# EAGLE board 555_Solar_Wind (EAGLE 6.4)
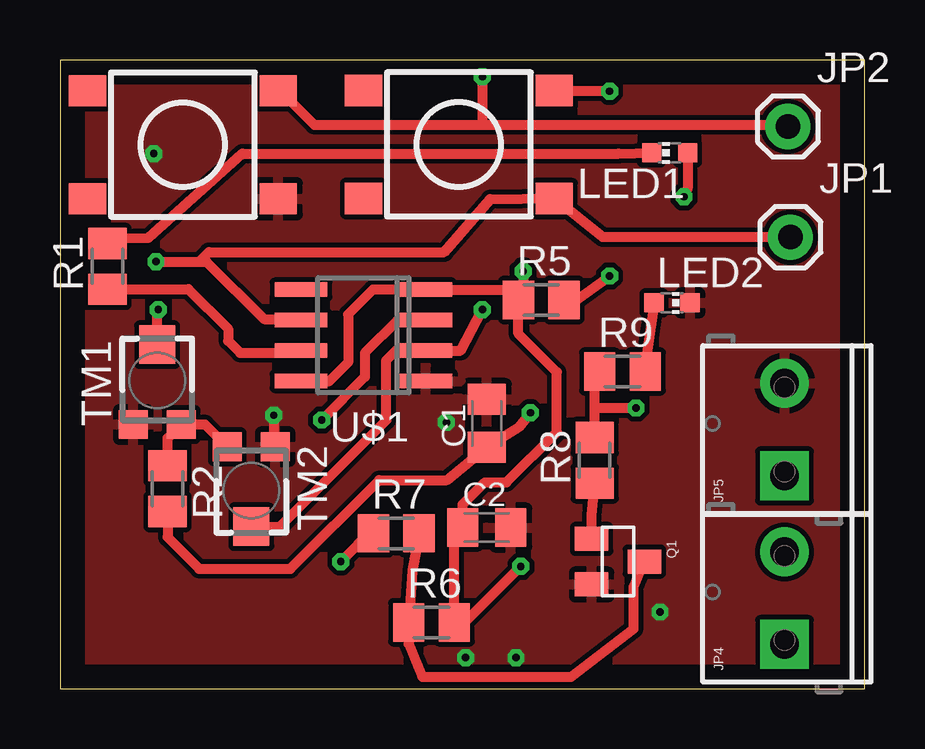
[diagram p0: board, top side]
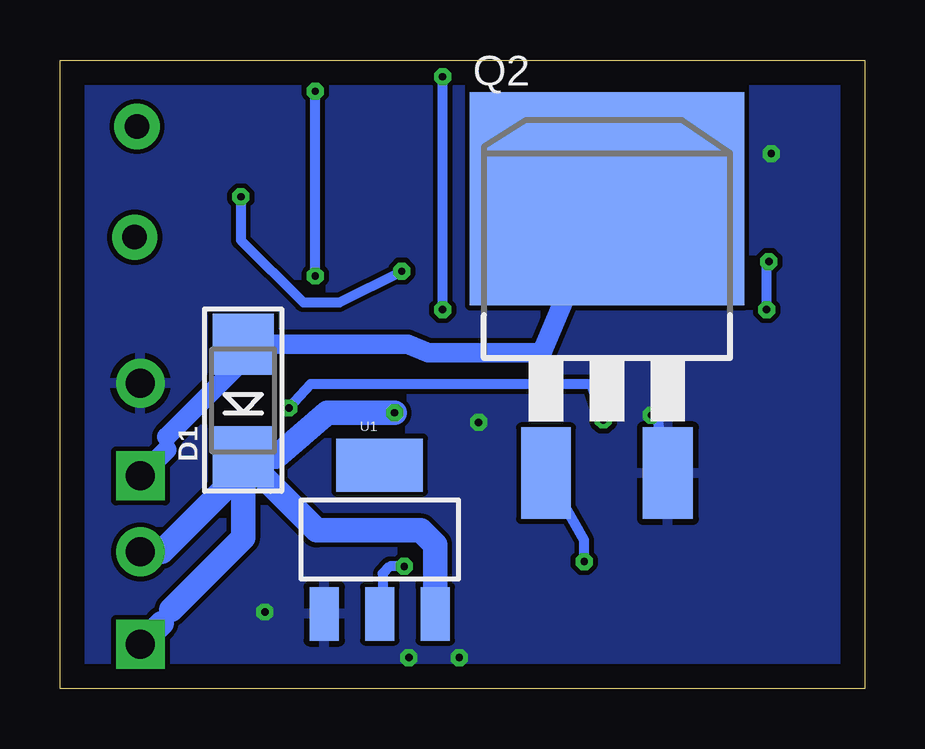
[diagram p1: board, bottom side, seen from below]

Size 33.54 x 26.2 mm. Coordinates in mm from the lower left corner, seen from the top.
Outline: 0,0 33.54,0 33.54,26.2 0,26.2 0,0
Copper layers (1*16): Top 0.035mm / dielectric 1.5mm / Bottom 0.035mm
Design rules "default": minimum track width 10mil, minimum drill 24mil, track to track 8mil, track to pad 8mil, pad to pad 8mil, via to via 8mil, smd to smd 8mil, copper to edge 40mil, drill to drill 8mil, minimum pad ring 10mil, minimum via ring 8mil, stop-mask expansion 4mil, vias tented up to drill 0mil, thermal gap 10mil

## Footprints (pad centres in the part's own frame; a part is rotated, then mirrored left to right if it is on the bottom)
C0805K = smd 1.3 x 1.6: 1 -1,0; 2 1,0
SMADIODE = smd 2.54 x 2.54: A 2.349,0; C -2.349,0
1X01 = drill 1.016 pad 1.88: 1 0,0
SCREWTERMINAL-3.5MM-2_LOCK = drill 1.2 pad 2.032 square: 1 -0.178,0 | drill 1.2 pad 2.032: 2 3.678,0
CHIP-LED0603 = smd 0.8 x 0.8: A 0,-0.75; C 0,0.75
SOT23 = smd 1 x 1.4: 1 -0.95,-1.1; 2 0.95,-1.1; 3 0,1.1
D2PACK = smd 2.083 x 3.81: 1 -2.54,-8.89; 3 2.54,-8.89 | smd 11.43 x 8.89: 2 0,2.54
M0805 = smd 1.3 x 1.6: 1 -0.95,0; 2 0.95,0
TACTILE_SWITCH_TALL = smd 1.55 x 1.3: A1 -3.975,-2.25; A2 3.975,-2.25; B1 -3.975,2.25; B2 3.975,2.25
TC33X = smd 1.2 x 1.2: 1 -1,-1.825; 3 1,-1.825 | smd 1.5 x 1.6: 2 0,1.5
SOT223 = smd 1.219 x 2.235: 1 -2.311,-3.099; 2 0,-3.099; 3 2.311,-3.099 | smd 3.6 x 2.2: 4 0,3.099
SO08 = smd 0.6 x 2.2: 1 -1.905,-2.6; 2 -0.635,-2.6; 3 0.635,-2.6; 4 1.905,-2.6; 5 1.905,2.6; 6 0.635,2.6; 7 -0.635,2.6; 8 -1.905,2.6

## Placement (x,y rotation side)
C1  .33uF  [C0805K]  17.78,11.06 90 top
C2  .1uF  [C0805K]  17.78,6.72 0 top
D1  S1BB  [SMADIODE]  25.91,12.01 90 bottom
JP1  M01PTH  [1X01]  30.43,18.82 0 top
JP2  M01PTH  [1X01]  30.33,23.43 0 top
JP4  M023.5MM_LOCK  [SCREWTERMINAL-3.5MM-2_LOCK]  30.19,2.03 90 top
JP5  M023.5MM_LOCK  [SCREWTERMINAL-3.5MM-2_LOCK]  30.19,9.05 90 top
LED1  [CHIP-LED0603]  25.4,22.33 90 top
LED2  [CHIP-LED0603]  25.5,16.08 270 top
Q1  MMBT2222A  [SOT23]  23.25,5.3 270 top
Q2  FQB33N10L  [D2PACK]  10.75,17.88 0 bottom
R1  1k  [M0805]  1.98,17.6 90 top
R2  330 Ohm  [M0805]  4.48,8.34 270 top
R5  330 Ohm  [M0805]  20.05,16.2 0 top
R6  330 Ohm  [M0805]  15.48,2.77 0 top
R7  100 Ohm  [M0805]  14.01,6.48 0 top
R8  1k  [M0805]  22.28,9.52 90 top
R9  1k  [M0805]  23.44,13.22 0 top
S1  SWITCH-MOMENTARY-2  [TACTILE_SWITCH_TALL]  16.62,22.68 0 top
S2  SWITCH-MOMENTARY-2  [TACTILE_SWITCH_TALL]  5.12,22.67 0 top
TM1  [TC33X]  4.05,12.84 0 top
TM2  [TC33X]  7.97,8.26 180 top
U1  5V  [SOT223]  20.22,6.22 0 bottom
U$1  NE555_SOIC  [SO08]  12.64,14.73 90 top

## Library data of the parts
C1 C2 R1 R2 R5-R9 = resistor
D1 = microbuilder
JP1 JP2 JP4 JP5 = SparkFun-Connectors
LED1 LED2 = led
Q1 = SparkFun-DiscreteSemi; PROD_ID: TRANS-08049
Q2 = transistor-power
S1 S2 = SparkFun-Electromechanical
TM1 TM2 = adafruit
U1 = SparkFun-PowerIC
U$1 = st-microelectronics

## Nets
5V: C2.1 LED1.A R5.1 R6.2 U1.2 U$1.4 U$1.8
12V: C1.1 D1.C JP4.1 JP4.2 R2.2 U1.3
GATE: Q2.1 R7.1
GND: C1.2 C2.2 JP5.2 LED2.C Q1.2 Q2.3 S2.A2 TM1.1 TM2.1 U1.1 U$1.1
N$1: LED2.A R9.2
N$2: R2.1 TM1.3 TM2.3
N$3: JP1.1 S1.A2 TM1.2 U$1.6
N$4: JP2.1 S2.B2 TM2.2 U$1.2
N$5: R5.2 S1.B2
N$6: Q1.3 R6.1 R7.2
N$10: LED1.C R1.2
N$11: R1.1 U$1.7
N$12: R8.2 R9.1 U$1.3
N$13: Q1.1 R8.1
RELAY_1: D1.A JP5.1 Q2.2

## Tracks (layer width: path | path; a pad name or v marks a point on that pad's centre or on a via)
5V  (via drill 0.3)
  Top 0.406: U$1.8 11.22,12.82 12,13.6 12,15.6 13.04,16.64 U$1.4 18.66,16.64 18.75,16.55 | 18.75,16.55 R5.1 19.1,14.8 20.7,13.2 20.7,10.7 18.6,8.6 17.7,8.6 16.78,7.68 C2.1 16.43,6.37 R6.2 16.87,2.77 v19.2,5.1 | LED1.A 26.15,20.85 v26,20.5 | v19.3,17.4 19.3,16.9 18.75,16.55
  Bottom 0.406: v19.2,5.1 19.8,5.1 20.1,4.8 20.1,3.24 U1.2 | v26,20.5 26,18.7 23.4,16.1 21.9,16.1 v19.3,17.4
12V  (via drill 0.3)
  Top 0.406: R2.2 4.48,6.32 5.8,5 9.6,5 13.3,8.7 16.12,8.7 C1.1 19.12,10.9 v19.6,11.5
  Bottom 0.406: D1.C 25.91,9.1 | 28.9,3.3 29.31,2.73
  Bottom 1.016: 28.9,3.3 25.91,6.29 25.91,9.1 29.3,5.71 JP4.2 | 29.31,2.73 JP4.1 | v19.6,11.5 22.4,11.5 24.54,9.66 D1.C 22.85,6.6 18.5,6.6 17.91,6.01 U1.3
GATE  (via drill 0.3)
  Top 0.406: R7.1 13.04,6.64 v11.7,5.3
  Bottom 0.406: v11.7,5.3 11.7,6.2 Q2.1
GND  (via drill 0.3)
  Top 0.406: v8.9,11.4 8.9,10.15 TM2.1
  Bottom 0.406: Q2.3 8.61,11.11 v8.9,11.4
  other vias: 3.9,22.3 25,3.2 19,1.3 16.9,1.3 16.1,11.1
  pour Top: -2,-3 -2,30 42,30 42,-3
  pour Bottom: -2,-3 -2,30 42,30 42,-3
N$1
  Top 0.406: LED2.A 24.35,13.26 R9.2
N$2
  Top 0.406: R2.1 4.48,10.45 TM1.3 6.04,11.02 TM2.3
N$3  (via drill 0.3)
  Top 0.406: JP1.1 22.61,18.82 S1.A2 17.93,20.4 16,18.2 6.2,18.2 5.8,17.8 | TM1.2 4.05,15.75 v4.1,15.8 | v4,17.8 5.8,17.8 | 5.8,17.8 6.1,17.8 8.5,15.4 10.01,15.4 U$1.6
  Bottom 0.406: v4.1,15.8 4.1,17.7 v4,17.8
N$4  (via drill 0.3)
  Top 0.406: TM2.2 9.16,6.76 13.6,11.2 13.6,13.7 14,14.1 U$1.2 16.7,14.1 v17.6,15.8 | S2.B2 9.18,24.92 10.6,23.5 17.6,23.5 | 17.6,23.5 30.26,23.5 JP2.1 | v17.6,25.5 17.6,23.5
  Bottom 0.406: v17.6,15.8 v17.6,25.5
N$5  (via drill 0.3)
  Top 0.406: R5.2 21.5,16.2 v22.9,17.2 | v22.9,24.9 21.23,24.9 S1.B2
  Bottom 0.406: v22.9,17.2 v22.9,24.9
N$6
  Top 0.406: R7.2 14.68,4.92 R6.1 14.53,1.87 15.1,0.5 21.3,0.5 23.9,2.5 23.9,4.25 Q1.3
N$10
  Top 0.406: R1.2 1.85,18.75 3.7,18.8 7.6,22.3 23.28,22.3 LED1.C
N$11
  Top 0.406: R1.1 5.35,16.65 7,15 7,14.5 7.5,14 9.95,14 U$1.7
N$12  (via drill 0.3)
  Top 0.406: R8.2 22.28,11.8 | 22.28,11.8 22.28,13.01 R9.1 | U$1.3 14.06,15.37 12.7,14 12.7,13 v10.9,11.2 | v24,11.7 22.38,11.7 22.28,11.8
  Bottom 0.406: v10.9,11.2 11.4,12.7 23.1,12.7 v24,11.7
N$13
  Top 0.406: Q1.1 22.15,7.24 R8.1
RELAY_1
  Bottom 0.406: JP5.1 30.19,8.69 30.1,8.6 | D1.A 25.91,13.69 | 29.1,10.5 29.1,9.96
  Bottom 0.813: 25.91,13.69 29.1,10.5 | 29.1,9.96 JP5.1 | D1.A 19.06,14.36 18.2,14 13.47,14 Q2.2